# EAGLE board controller (EAGLE 9.6.1)
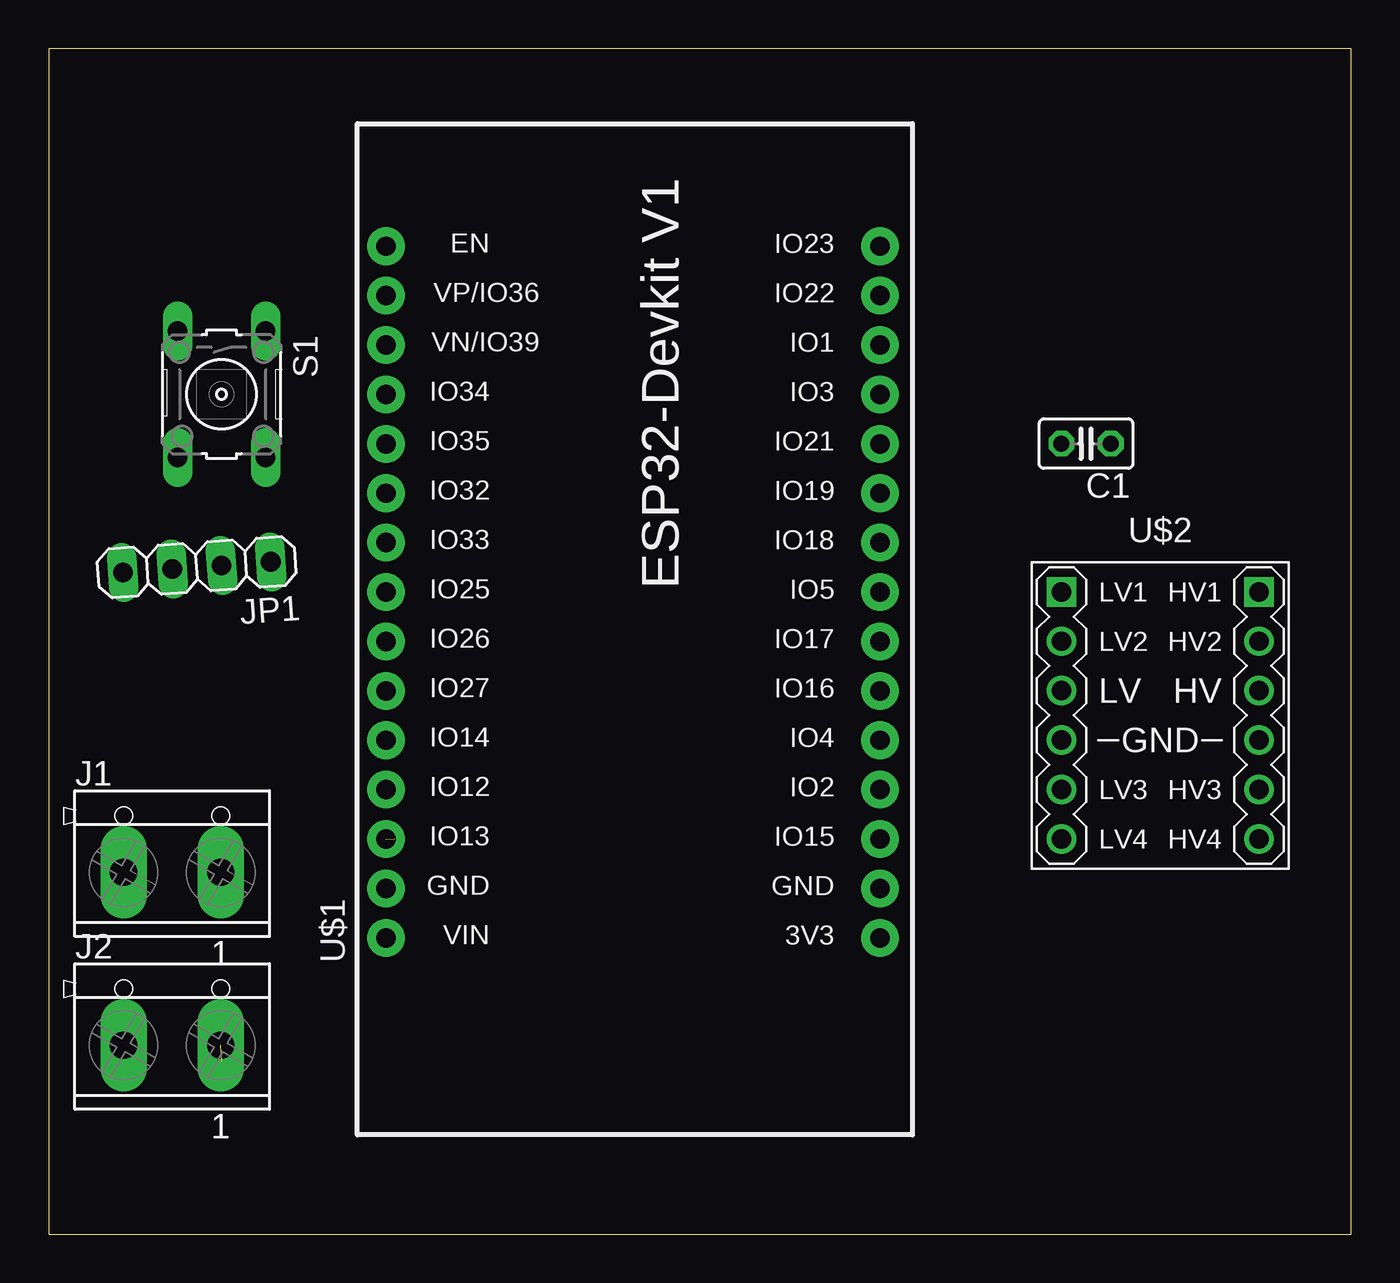
[diagram p0: board, top side]
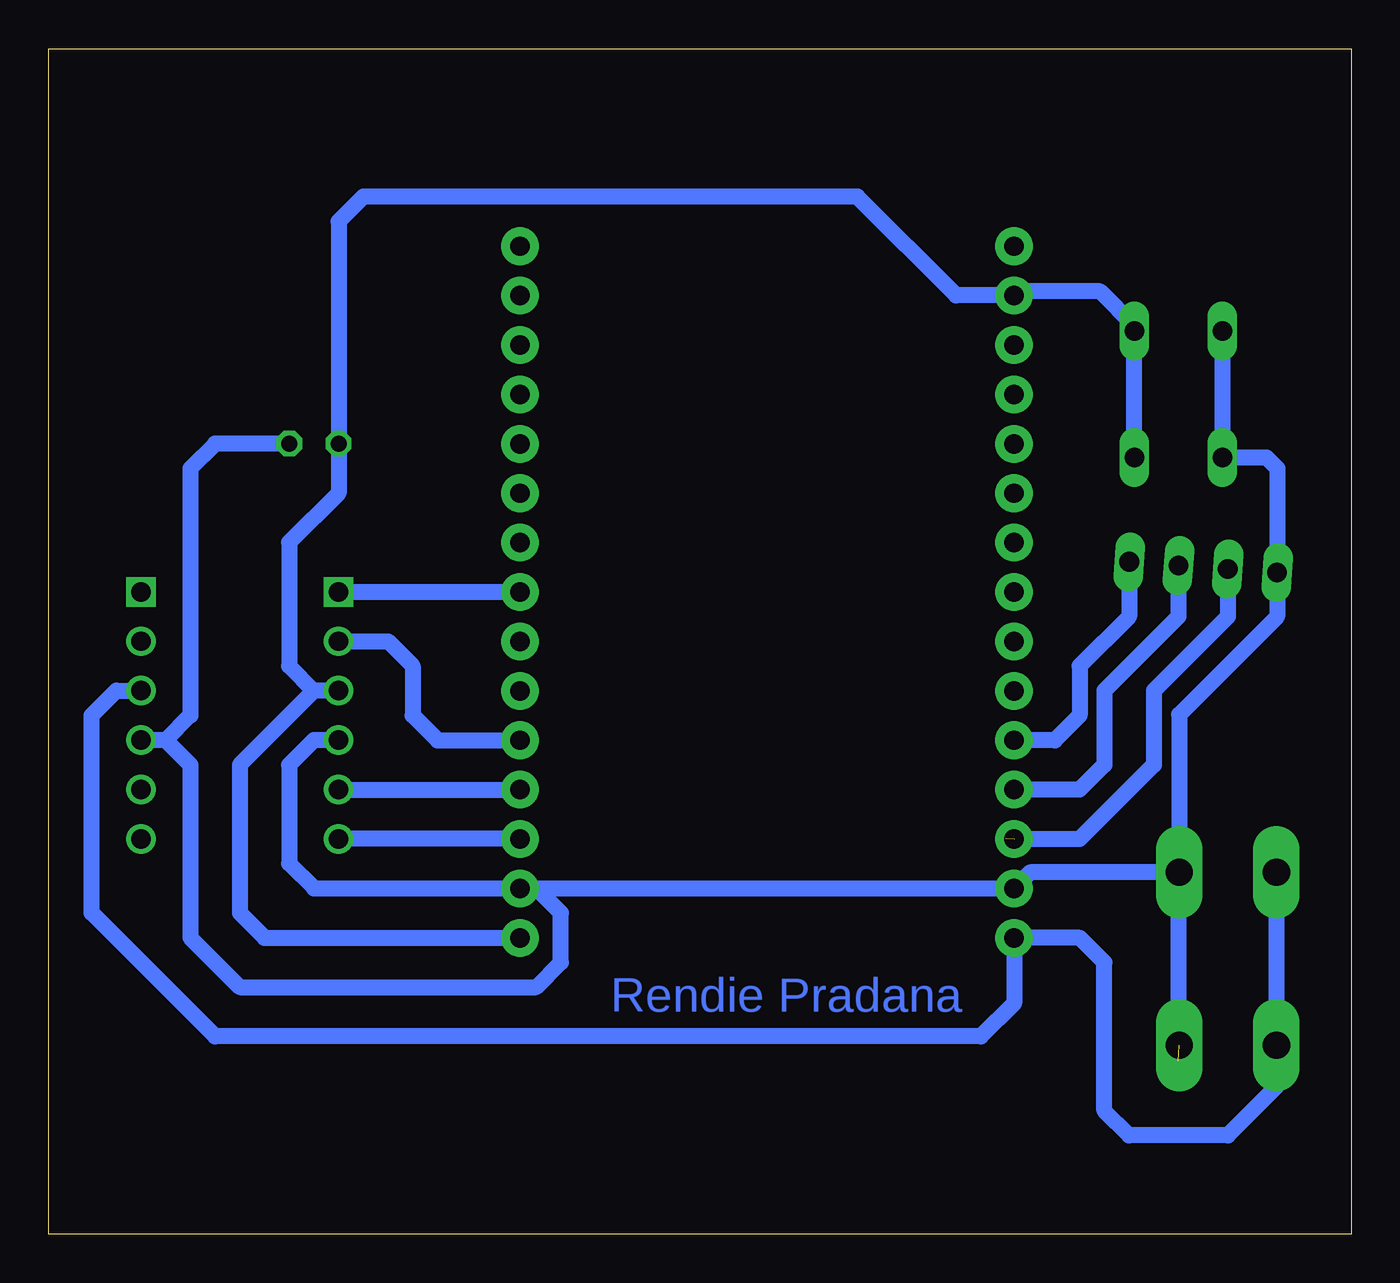
[diagram p1: board, bottom side, seen from below]

Size 66.98 x 60.95 mm. Coordinates in mm from the lower left corner, seen from the top.
Outline: 0,0 66.98,0 66.98,60.95 0,60.95 0,0
Copper layers (1*16): Top 0.035mm / dielectric 1.5mm / Bottom 0.035mm
Design rules "default": minimum track width 6mil, minimum drill 0.35mm, track to track 6mil, track to pad 6mil, pad to pad 6mil, via to via 6mil, smd to smd 6mil, copper to edge 40mil, drill to drill 6mil, minimum pad ring 10mil, minimum via ring 8mil, stop-mask expansion 4mil, vias tented up to drill 0mil, thermal gap 10mil

## Footprints (pad centres in the part's own frame; a part is rotated, then mirrored left to right if it is on the bottom)
C025-025X050 = drill 0.813 octagon: 1 -1.27,0; 2 1.27,0
TERMINAL_BLOCK_2P_5 = drill 1.4 pad 2.38 long: 1 2.5,-0.45; 2 -2.5,-0.45
1X04 = drill 1.016 long: 1 -3.81,0; 2 -1.27,0; 3 1.27,0; 4 3.81,0
B3F-10XX = drill 1.016 long: 1 -3.251,2.261; 2 3.251,2.261; 3 -3.251,-2.261; 4 3.251,-2.261
ESP32-DEVKITV1 = drill 1 pad 1.93: 3V3 -16.52,-12.27; D1 13.96,-12.27; D2 -8.9,-12.27; D3 11.42,-12.27; D4 -6.36,-12.27; D5 1.26,-12.27; D12 -8.9,13.135; D13 -11.44,13.135; D14 -6.36,13.135; D15 -11.44,-12.27; D16 -3.82,-12.27; D17 -1.28,-12.27; D18 3.8,-12.27; D19 6.34,-12.27; D21 8.88,-12.27; D22 16.5,-12.27; D23 19.04,-12.27; D25 1.26,13.135; D26 -1.28,13.135; D27 -3.82,13.135; D32 6.34,13.135; D33 3.8,13.135; D34 11.42,13.135; D35 8.88,13.135; D36 16.5,13.135; D39 13.96,13.135; EN 19.04,13.135; GND@1 -13.98,13.135; GND@2 -13.98,-12.27; VIN -16.52,13.135
LEVEL-SHIFTER-4CH = drill 1 square: J1.1 -5.08,6.35; J2.1 5.08,6.35 | drill 1: J1.2 -5.08,3.81; J1.3 -5.08,1.27; J1.4 -5.08,-1.27; J1.5 -5.08,-3.81; J1.6 -5.08,-6.35; J2.2 5.08,3.81; J2.3 5.08,1.27; J2.4 5.08,-1.27; J2.5 5.08,-3.81; J2.6 5.08,-6.35

## Placement (x,y rotation side)
C1  [C025-025X050]  53.34,40.64 180 top
J1  CON_TERMINAL_BLOCK_02-5MM  [TERMINAL_BLOCK_2P_5]  6.35,19.05 0 top
J2  CON_TERMINAL_BLOCK_02-5MM  [TERMINAL_BLOCK_2P_5]  6.35,10.16 0 top
JP1  [1X04]  7.62,34.29 184.1 top
S1  [B3F-10XX]  8.89,43.18 270 top
U$1  ESP32DEVKITV1  [ESP32-DEVKITV1]  30.48,31.75 90 top
U$2  LEVEL-SHIFTER-4CH  [LEVEL-SHIFTER-4CH]  57.15,26.67 0 top

## Library data of the parts
C1 = rcl; SPICEPREFIX: C
J1 J2 = tblok
JP1 = pinhead
S1 = switch-omron; MPN: B3F-1000; OC_FARNELL: 176432; OC_NEWARK: 36M3542
U$1 = esp32-devkitv1
U$2 = diy-model

## Nets
GND: C1.1 J1.1 J2.1 JP1.4 S1.3 S1.4 U$1.GND@1 U$1.GND@2 U$2.J1.4 U$2.J2.4
HV: J1.2 J2.2 U$1.VIN U$2.J2.3
LV: C1.2 S1.1 S1.2 U$1.3V3 U$1.D36 U$2.J1.3
LV1: U$1.D5 U$2.J1.1
LV2: U$1.D4 U$2.J1.2
LV3: U$1.D2 U$2.J1.5
LV4: U$1.D15 U$2.J1.6
OUT1: JP1.1 U$1.D14
OUT2: JP1.2 U$1.D12
OUT3: JP1.3 U$1.D13

## Tracks (layer width: path | path; a pad name or v marks a point on that pad's centre or on a via)
GND  (1 unrouted)
  Bottom 0.152: JP1.4
  Bottom 0.813: S1.3 S1.4 4.37,39.93 3.81,39.37 JP1.4 | C1.1 58.42,40.64 59.69,39.37 59.69,26.67 60.96,25.4 | 60.96,25.4 U$2.J2.4 | 60.96,25.4 59.69,24.13 59.69,15.24 57.15,12.7 41.91,12.7 40.64,13.97 40.64,16.51 41.9,17.77 U$1.GND@2 | U$2.J1.4 53.34,25.4 54.61,24.13 54.61,19.05 53.33,17.77 U$1.GND@2 | U$1.GND@2 U$1.GND@1 16.52,18.6 J1.1 | JP1.4 3.82,31.74 8.85,26.71 J1.1 | 8.89,18.64 J1.1 | J1.1 8.89,18.56 8.89,8.89
HV
  Bottom 0.813: J1.2 J2.2 3.85,7.58 6.35,5.08 11.43,5.08 12.7,6.35 12.7,13.97 13.96,15.23 U$1.VIN 17.34,11.87 19.05,10.16 58.42,10.16 64.77,16.51 64.77,26.67 63.5,27.94 U$2.J2.3
LV
  Bottom 0.152: 17.34,48.26 U$1.D36 17.57,48.47
  Bottom 0.813: S1.2 S1.1 11.15,46.71 12.91,48.47 17.57,48.47 | U$1.D36 20.32,48.26 25.4,53.34 50.8,53.34 52.07,52.07 C1.2 52.07,38.1 54.61,35.56 54.61,29.21 53.34,27.94 | U$2.J1.3 53.34,27.94 | 53.34,27.94 57.15,24.13 57.15,16.51 55.87,15.23 U$1.3V3
LV1
  Bottom 0.152: U$2.J1.1
  Bottom 0.813: U$1.D5 U$2.J1.1
LV2
  Bottom 0.152: 43.17,25.39 U$1.D4
  Bottom 0.813: U$2.J1.2 49.53,30.48 48.26,29.21 48.26,26.67 46.98,25.39 43.17,25.39
LV3
  Bottom 0.813: U$2.J1.5 U$1.D2
LV4
  Bottom 0.152: U$2.J1.6
  Bottom 0.813: U$1.D15 U$2.J1.6
OUT1
  Bottom 0.813: JP1.1 11.43,31.75 13.97,29.21 13.97,26.67 15.25,25.39 U$1.D14
OUT2
  Bottom 0.813: JP1.2 8.89,31.75 12.7,27.94 12.7,24.13 13.98,22.85 U$1.D12
OUT3  (1 unrouted)
  Bottom 0.152: 17.78,20.32 17.77,20.31
  Bottom 0.813: JP1.3 6.35,31.75 10.16,27.94 10.16,24.13 13.98,20.31 U$1.D13

## Text on the board
Bottom: Rendie Pradana